# EAGLE board CT_schematic (EAGLE 7.6.0)

Size 100 x 80 mm. Coordinates in mm from the lower left corner, seen from the top.
Outline: 0,0 100,0 100,80 0,80 0,0
Copper layers (1*16): Top 0.035mm / dielectric 1.5mm / Bottom 0.035mm
Design rules "default": minimum track width 10mil, minimum drill 24mil, track to track 8mil, track to pad 8mil, pad to pad 8mil, via to via 8mil, smd to smd 8mil, copper to edge 40mil, drill to drill 8mil, minimum pad ring 10mil, minimum via ring 8mil, stop-mask expansion 4mil, vias tented up to drill 0mil, thermal gap 10mil

## Footprints (pad centres in the part's own frame; a part is rotated, then mirrored left to right if it is on the bottom)
C0603 = smd 0.8 x 0.8: 1 -0.762,0; 2 0.762,0
C0402 = smd 0.5 x 0.5: 1 -0.508,0; 2 0.508,0
C0805 = smd 1.2 x 1.3: 1 -1.016,0; 2 1.016,0
C1206 = smd 1.3 x 1.6: 1 -1.524,0; 2 1.524,0
C1210 = smd 1.2 x 2.5: 1 -1.524,0; 2 1.524,0
EXV-9H = smd 3.505 x 1.676: 1 -2.857,0; 2 2.857,0
L0603 = smd 0.8 x 0.8: 1 -0.762,0; 2 0.762,0
L1210 = smd 1.2 x 2.5: 1 -1.524,0; 2 1.524,0
PJ-037B_PACKAGE = drill 3.7 square: 1 12,0 | drill 3.2 square: 2 6,0
R0603 = smd 0.8 x 0.8: 1 -0.762,0; 2 0.762,0
VFQFPN36 = smd 1.067 x 0.305: 1 -2.832,2; 2 -2.832,1.5; 3 -2.832,1; 4 -2.832,0.5; 5 -2.832,0; 6 -2.832,-0.5; 7 -2.832,-1; 8 -2.832,-1.5; 9 -2.832,-2; 19 2.832,-2; 20 2.832,-1.5; 21 2.832,-1; 22 2.832,-0.5; 23 2.832,0; 24 2.832,0.5; 25 2.832,1; 26 2.832,1.5; 27 2.832,2 | smd 0.305 x 1.067: 10 -2,-2.832; 11 -1.5,-2.832; 12 -1,-2.832; 13 -0.5,-2.832; 14 0,-2.832; 15 0.5,-2.832; 16 1,-2.832; 17 1.5,-2.832; 18 2,-2.832; 28 2,2.832; 29 1.5,2.832; 30 1,2.832; 31 0.5,2.832; 32 0,2.832; 33 -0.5,2.832; 34 -1,2.832; 35 -1.5,2.832; 36 -2,2.832 | smd 4.242 x 4.242: 37 0,0
SOIC-8 = smd 1.6 x 0.6: 1 -2.7,1.905 | smd 1.55 x 0.6: 2 -2.7,0.635; 3 -2.7,-0.635; 4 -2.7,-1.905; 5 2.7,-1.905; 6 2.7,-0.635; 7 2.7,0.635; 8 2.7,1.905
SSOP-20 = smd 1.651 x 0.432: 1 -3.48,2.925; 2 -3.48,2.275; 3 -3.48,1.625; 4 -3.48,0.975; 5 -3.48,0.325; 6 -3.48,-0.325; 7 -3.48,-0.975; 8 -3.48,-1.625; 9 -3.48,-2.275; 10 -3.48,-2.925; 11 3.48,-2.925; 12 3.48,-2.275; 13 3.48,-1.625; 14 3.48,-0.975; 15 3.48,-0.325; 16 3.48,0.325; 17 3.48,0.975; 18 3.48,1.625; 19 3.48,2.275; 20 3.48,2.925
182-009-MALE = drill 1.194 pad 1.524 octagon: 1 -5.537,10.923; 2 -2.769,10.923; 3 0,10.923; 4 2.769,10.923; 5 5.537,10.923; 6 -4.153,8.08; 7 -1.384,8.08; 8 1.384,8.08; 9 4.153,8.08 | hole 3.048: -12.446,9.501; 12.446,9.501
LGA-8 = smd 0.838 x 0.559: 1 -1.003,1.875; 2 -1.003,0.625; 3 -1.003,-0.625; 4 -1.003,-1.875; 5 1.003,-1.875; 6 1.003,-0.625; 7 1.003,0.625; 8 1.003,1.875
ABLS-25.000MHZ-B2F-T = smd 5.6 x 2.8: 1 -3.81,0; 2 5.69,0
WSON-8 = smd 0.3 x 0.6: 1 -0.75,0; 2 0.05,0; 3 0.85,0; 4 1.65,0; 5 1.65,3.8; 6 0.85,3.8; 7 0.05,3.8; 8 -0.75,3.8 | smd 3 x 2.6: PAD 0.45,1.9
SON-6 = smd 0.55 x 0.3: 1 -0.355,0.5 | smd 0.52 x 0.3: 2 -0.37,0; 3 -0.37,-0.5; 4 0.37,-0.5; 5 0.37,0; 6 0.37,0.5
SW_4-1437565-2 = smd 1.4 x 2.1: 1 -2.23,4.55; 2 -2.23,-4.55; 3 2.23,4.55; 4 2.23,-4.55
LGM67K-G1J2-24-Z = smd 0.8 x 1.4: A -2,0; C 0,0
NC7SZ125M5X = smd 1.3 x 0.7: 1 -1.3,0.95; 2 -1.3,0; 3 -1.3,-0.95; 4 1.3,-0.95; 5 1.3,0.95

## Placement (x,y rotation side)
C1  1e-07  [C0603]  -53.34,59.69 0 top  (outside the outline)
C2  1e-07  [C0603]  -57.15,59.69 0 top  (outside the outline)
C3  1e-07  [C0603]  -60.96,59.69 0 top  (outside the outline)
C4  4.7e-06  [C0603]  -49.53,59.69 0 top  (outside the outline)
C5  1e-07  [C0603]  -64.77,59.69 0 top  (outside the outline)
C6  1e-07  [C0603]  -68.58,59.69 0 top  (outside the outline)
C7  1e-08  [C0603]  -15.24,64.77 0 top  (outside the outline)
C8  1e-08  [C0603]  -19.05,64.77 0 top  (outside the outline)
C9  1e-06  [C0603]  -22.86,64.77 0 top  (outside the outline)
C10  1e-11  [C0402]  -68.58,64.77 0 top  (outside the outline)
C11  1e-11  [C0402]  -15.24,69.85 0 top  (outside the outline)
C12  1e-08  [C0402]  -19.05,69.85 0 top  (outside the outline)
C13  1e-06  [C0603]  -26.67,64.77 0 top  (outside the outline)
C14  1e-06  [C0603]  -30.48,64.77 0 top  (outside the outline)
C15  1e-06  [C0603]  -34.29,64.77 0 top  (outside the outline)
C16  4.7e-06  [C0805]  -27.94,53.34 0 top  (outside the outline)
C17  1e-07  [C0402]  -22.86,69.85 0 top  (outside the outline)
C18  1e-05  [C0805]  -33.02,53.34 0 top  (outside the outline)
C19  1e-07  [C0402]  -26.67,69.85 0 top  (outside the outline)
C20  1e-07  [C0402]  -30.48,69.85 0 top  (outside the outline)
C21  1e-08  [C0402]  -34.29,69.85 0 top  (outside the outline)
C22  1e-05  [C1206]  -16.51,53.34 0 top  (outside the outline)
C23  1e-05  [C1210]  -49.53,46.99 0 top  (outside the outline)
C24  1e-07  [C0402]  -38.1,69.85 0 top  (outside the outline)
C25  0.0001  [EXV-9H]  -46.99,38.1 0 top  (outside the outline)
C26  0.0001  [EXV-9H]  -58.42,38.1 0 top  (outside the outline)
C27  1e-08  [C0402]  -41.91,69.85 0 top  (outside the outline)
F1  240.0  [L0603]  -38.1,64.77 0 top  (outside the outline)
I1  1.5e-05  [L1210]  -55.88,46.99 0 top  (outside the outline)
J1  PJ-037B  [PJ-037B_PACKAGE]  -67.31,7.62 0 top  (outside the outline)
R1  10000.0  [R0603]  -68.58,53.34 0 top  (outside the outline)
R2  1000.0  [R0603]  -41.91,64.77 0 top  (outside the outline)
R3  1270.0  [R0603]  -45.72,64.77 0 top  (outside the outline)
R4  4700.0  [R0603]  -49.53,64.77 0 top  (outside the outline)
R5  2200.0  [R0603]  -53.34,64.77 0 top  (outside the outline)
R6  2200.0  [R0603]  -57.15,64.77 0 top  (outside the outline)
R7  10000.0  [R0603]  -15.24,59.69 0 top  (outside the outline)
R8  10000.0  [R0603]  -20.32,59.69 0 top  (outside the outline)
R9  10000.0  [R0603]  -25.4,59.69 0 top  (outside the outline)
R10  10000.0  [R0603]  -30.48,59.69 0 top  (outside the outline)
R11  100000.0  [R0603]  -38.1,53.34 0 top  (outside the outline)
R12  100000.0  [R0603]  -43.18,53.34 0 top  (outside the outline)
R13  100000.0  [R0603]  -48.26,53.34 0 top  (outside the outline)
R14  100000.0  [R0603]  -53.34,53.34 0 top  (outside the outline)
R15  1500.0  [R0603]  -60.96,64.77 0 top  (outside the outline)
R16  1000.0  [R0603]  -64.77,64.77 0 top  (outside the outline)
R17  10000.0  [R0603]  -35.56,59.69 0 top  (outside the outline)
R18  10000.0  [R0603]  -40.64,59.69 0 top  (outside the outline)
R19  18000.0  [R0603]  -45.72,59.69 0 top  (outside the outline)
R20  470000.0  [R0603]  -58.42,53.34 0 top  (outside the outline)
R21  120000.0  [R0603]  -63.5,53.34 0 top  (outside the outline)
U1  STM32F101TBU6  [VFQFPN36]  -36.83,38.1 0 top  (outside the outline)
U2  AT25128B-SSHL-T  [SOIC-8]  -44.45,27.94 0 top  (outside the outline)
U3  MAX3218EAP+T  [SSOP-20]  -54.61,26.67 0 top  (outside the outline)
U4  182-009-113R531  [182-009-MALE]  -36.83,6.35 0 top  (outside the outline)
U5  MPL3115A2R1  [LGA-8]  -60.96,46.99 0 top  (outside the outline)
U6  ABLS-25.000MHZ-B2F-T  [ABLS-25.000MHZ-B2F-T]  -26.67,46.99 0 top  (outside the outline)
U7  LP3878SDX-ADJ/NOPB  [WSON-8]  -30.48,36.83 0 top  (outside the outline)
U8  TPS3895ADRYR  [SON-6]  -44.45,68.58 0 top  (outside the outline)
U9  4-1437565-2  [SW_4-1437565-2]  -27.94,27.94 0 top  (outside the outline)
U10  Q65110A2395  [LGM67K-G1J2-24-Z]  -38.1,46.99 0 top  (outside the outline)
U11  nc7sz125m5x  [NC7SZ125M5X]  -21.59,53.34 0 top  (outside the outline)

## Library data of the parts
C1-C27 F1 I1 J1 R1-R21 U1-U11 = circuit_tree

## Nets
CLK_CRYSTAL_U1_2: C10.1 U1.2 U6.1
CLK_CRYSTAL_U1_3: C11.1 U1.3 U6.2
GND: C1.2 C2.2 C3.2 C4.2 C5.2 C6.2 C7.2 C8.2 C9.2 C10.2 C11.2 C12.2 C13.2 C14.2 C15.2 C17.2 C18.2 C19.2 C20.2 C21.2 C22.2 C23.2 C24.2 C25.2 C26.2 C27.2 J1.2 R2.2 R7.2 R16.2 R19.2 R21.2 U1.5 U1.18 U1.26 U1.36 U1.37 U2.4 U3.5 U3.17 U3.20 U4.5 U5.3 U7.3 U7.PAD U8.2 U10.C U11.1 U11.3
NET_U1_4: R4.1 U1.4 U11.4
NET_U1_6: C7.1 C8.1 C9.1 F1.1 U1.6
NET_U1_31: R3.1 U1.31 U10.A
NET_U1_32: R1.1 U1.32 U9.3 U9.4
NET_U1_33: R5.1 U1.33 U5.8
NET_U1_34: R6.1 U1.34 U5.7
NET_U1_35: R7.1 U1.35
NET_U2_3: R8.1 U2.3
NET_U2_7: R10.1 U2.7
NET_U3_1: I1.1 U3.1
NET_U3_2: R11.1 U3.2
NET_U3_3: R12.1 U3.3
NET_U3_4: R13.1 U3.4
NET_U3_15: C15.1 U3.15
NET_U3_16: C16.2 U3.16
NET_U3_18: C16.1 U3.18
NET_U3_19: C14.1 U3.19
NET_U4_2: U3.12 U4.2
NET_U4_3: U3.14 U4.3
NET_U4_7: U3.11 U4.7
NET_U4_8: U3.13 U4.8
NET_U5_2: C20.1 U5.2
NET_U7_1: C21.1 U7.1
NET_U7_6: R15.2 R16.1 U7.6
NET_U7_8: R14.1 U7.8
NET_U8_1: R18.1 R19.1 U8.1
NET_U8_3: R20.2 R21.1 U8.3
NET_U8_4: R17.1 U8.4 U11.2
NET_U9_1: R2.1 U9.1 U9.2
PROC_SPI1_MISO: U1.13 U2.2
PROC_SPI1_MOSI: U1.14 U2.5
PROC_SPI1_NSS: R9.1 U1.11 U2.1
PROC_SPI1_SCK: U1.12 U2.6
PROC_USART1_CTS: U1.23 U3.8
PROC_USART1_RX: U1.22 U3.9
PROC_USART1_TX: U1.21 U3.7
VCC_S1_9V8: C22.1 C25.1 C26.1 J1.1 R14.2 U7.4
VCC_TIER1_2V5: C1.1 C2.1 C3.1 C4.1 C5.1 C6.1 C12.1 C13.1 C17.1 C18.1 C19.1 C23.1 C24.1 C27.1 F1.2 I1.2 R1.2 R3.2 R4.2 R5.2 R6.2 R8.2 R9.2 R10.2 R11.2 R12.2 R13.2 R15.1 R17.2 R18.2 R20.1 U1.1 U1.19 U1.27 U2.8 U3.6 U5.1 U5.4 U7.5 U8.6 U11.5

## Tracks (layer width: path | path; a pad name or v marks a point on that pad's centre or on a via)
CLK_CRYSTAL_U1_2  (2 unrouted)
CLK_CRYSTAL_U1_3  (2 unrouted)
GND  (48 unrouted)
NET_U1_4  (2 unrouted)
NET_U1_6  (4 unrouted)
NET_U1_31  (2 unrouted)
NET_U1_32  (3 unrouted)
NET_U1_33  (2 unrouted)
NET_U1_34  (2 unrouted)
NET_U1_35  (1 unrouted)
NET_U2_3  (1 unrouted)
NET_U2_7  (1 unrouted)
NET_U3_1  (1 unrouted)
NET_U3_2  (1 unrouted)
NET_U3_3  (1 unrouted)
NET_U3_4  (1 unrouted)
NET_U3_15  (1 unrouted)
NET_U3_16  (1 unrouted)
NET_U3_18  (1 unrouted)
NET_U3_19  (1 unrouted)
NET_U4_2  (1 unrouted)
NET_U4_3  (1 unrouted)
NET_U4_7  (1 unrouted)
NET_U4_8  (1 unrouted)
NET_U5_2  (1 unrouted)
NET_U7_1  (1 unrouted)
NET_U7_6  (2 unrouted)
NET_U7_8  (1 unrouted)
NET_U8_1  (2 unrouted)
NET_U8_3  (2 unrouted)
NET_U8_4  (2 unrouted)
NET_U9_1  (2 unrouted)
PROC_SPI1_MISO  (1 unrouted)
PROC_SPI1_MOSI  (1 unrouted)
PROC_SPI1_NSS  (2 unrouted)
PROC_SPI1_SCK  (1 unrouted)
PROC_USART1_CTS  (1 unrouted)
PROC_USART1_RX  (1 unrouted)
PROC_USART1_TX  (1 unrouted)
VCC_S1_9V8  (5 unrouted)
VCC_TIER1_2V5  (40 unrouted)